# Altium PCB DE-260924.PcbDoc
Units mil, origin at the board's own origin, x right, y up, seen from the top; angles counter-clockwise.
Board outline 2677.17 x 2362.2 mil, 2 copper layers (Top Layer, Bottom Layer); 96 components, 62 nets, 249 pads, 31 vias.
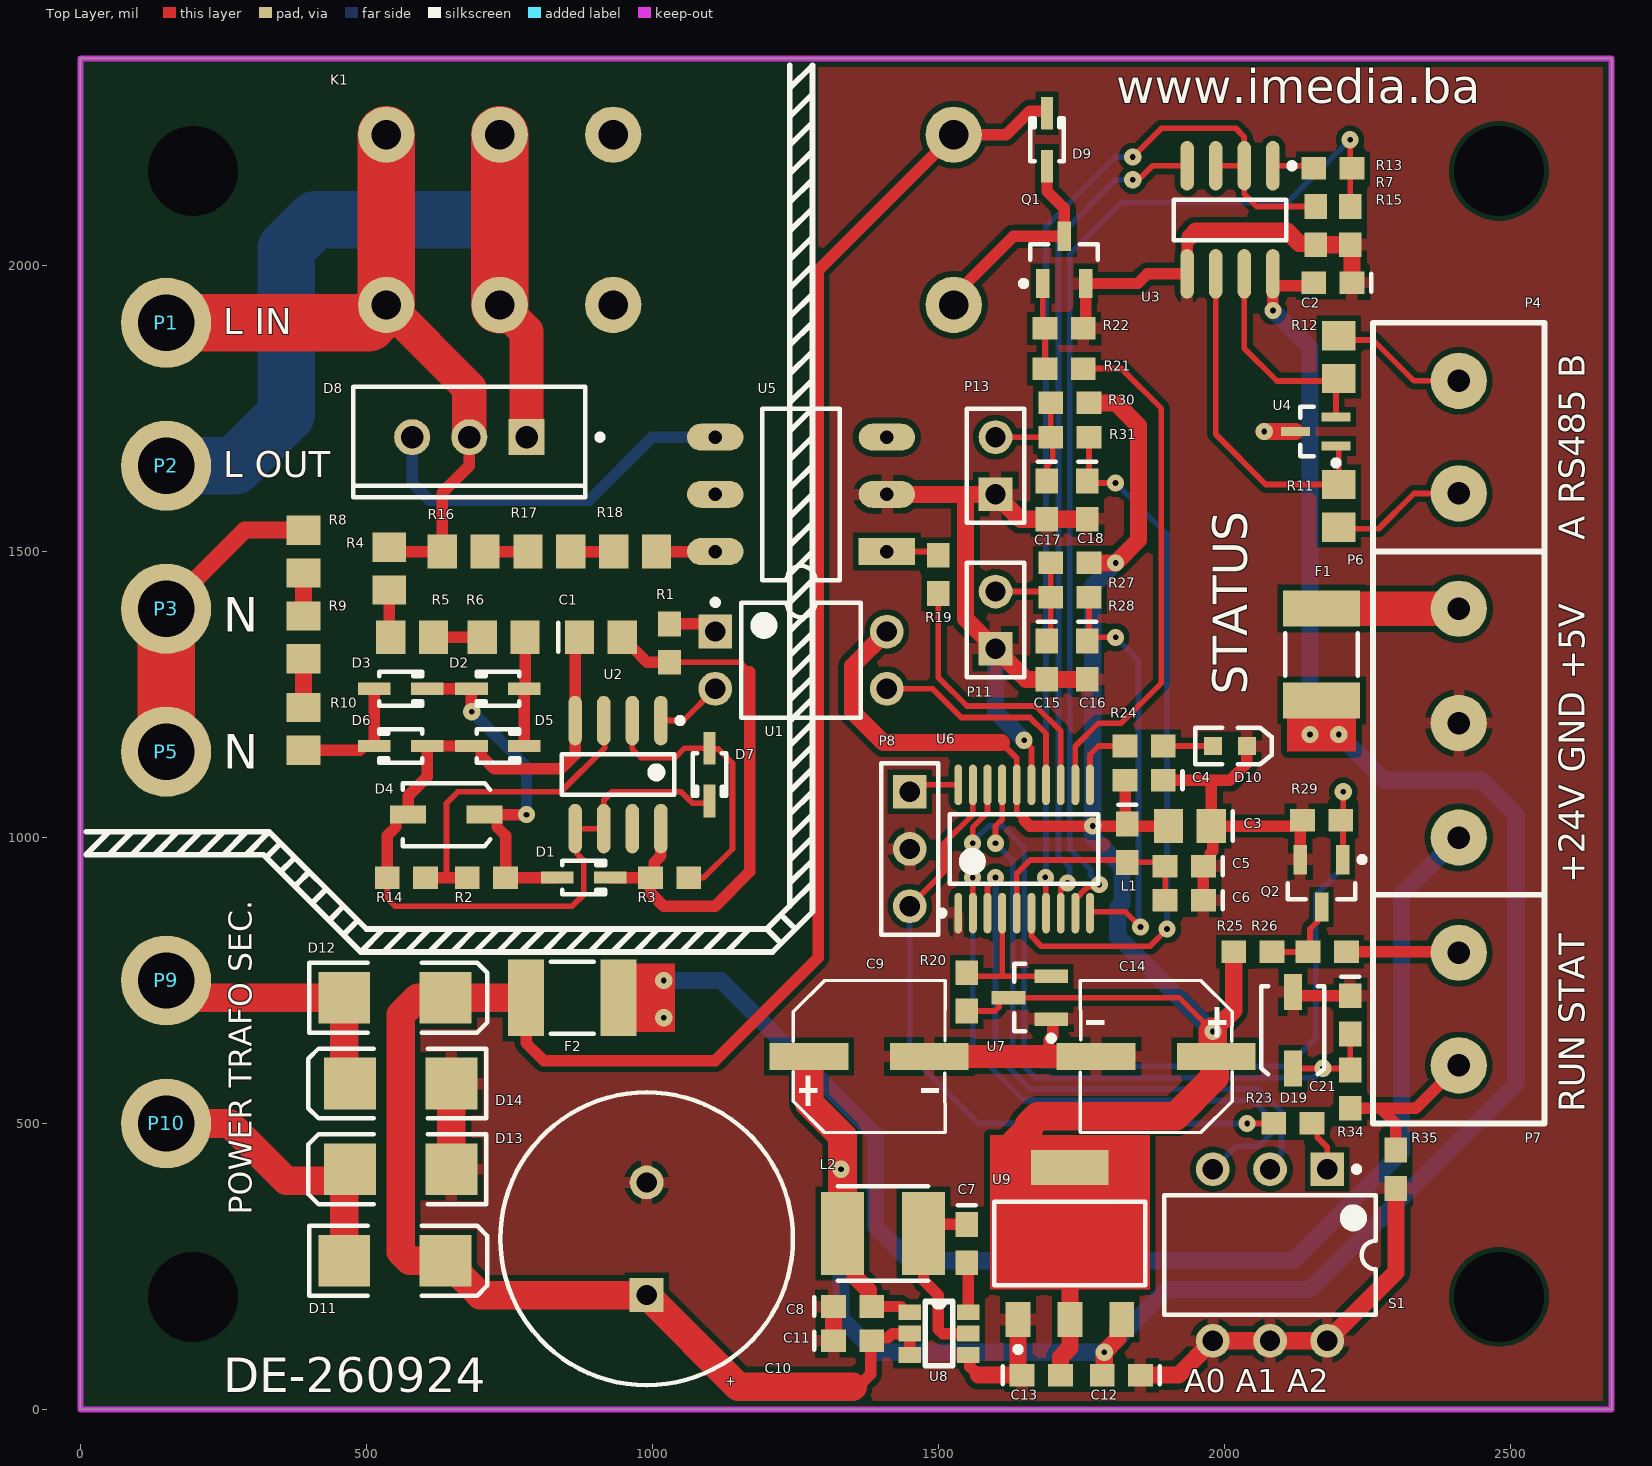
[diagram p0: Top Layer view]
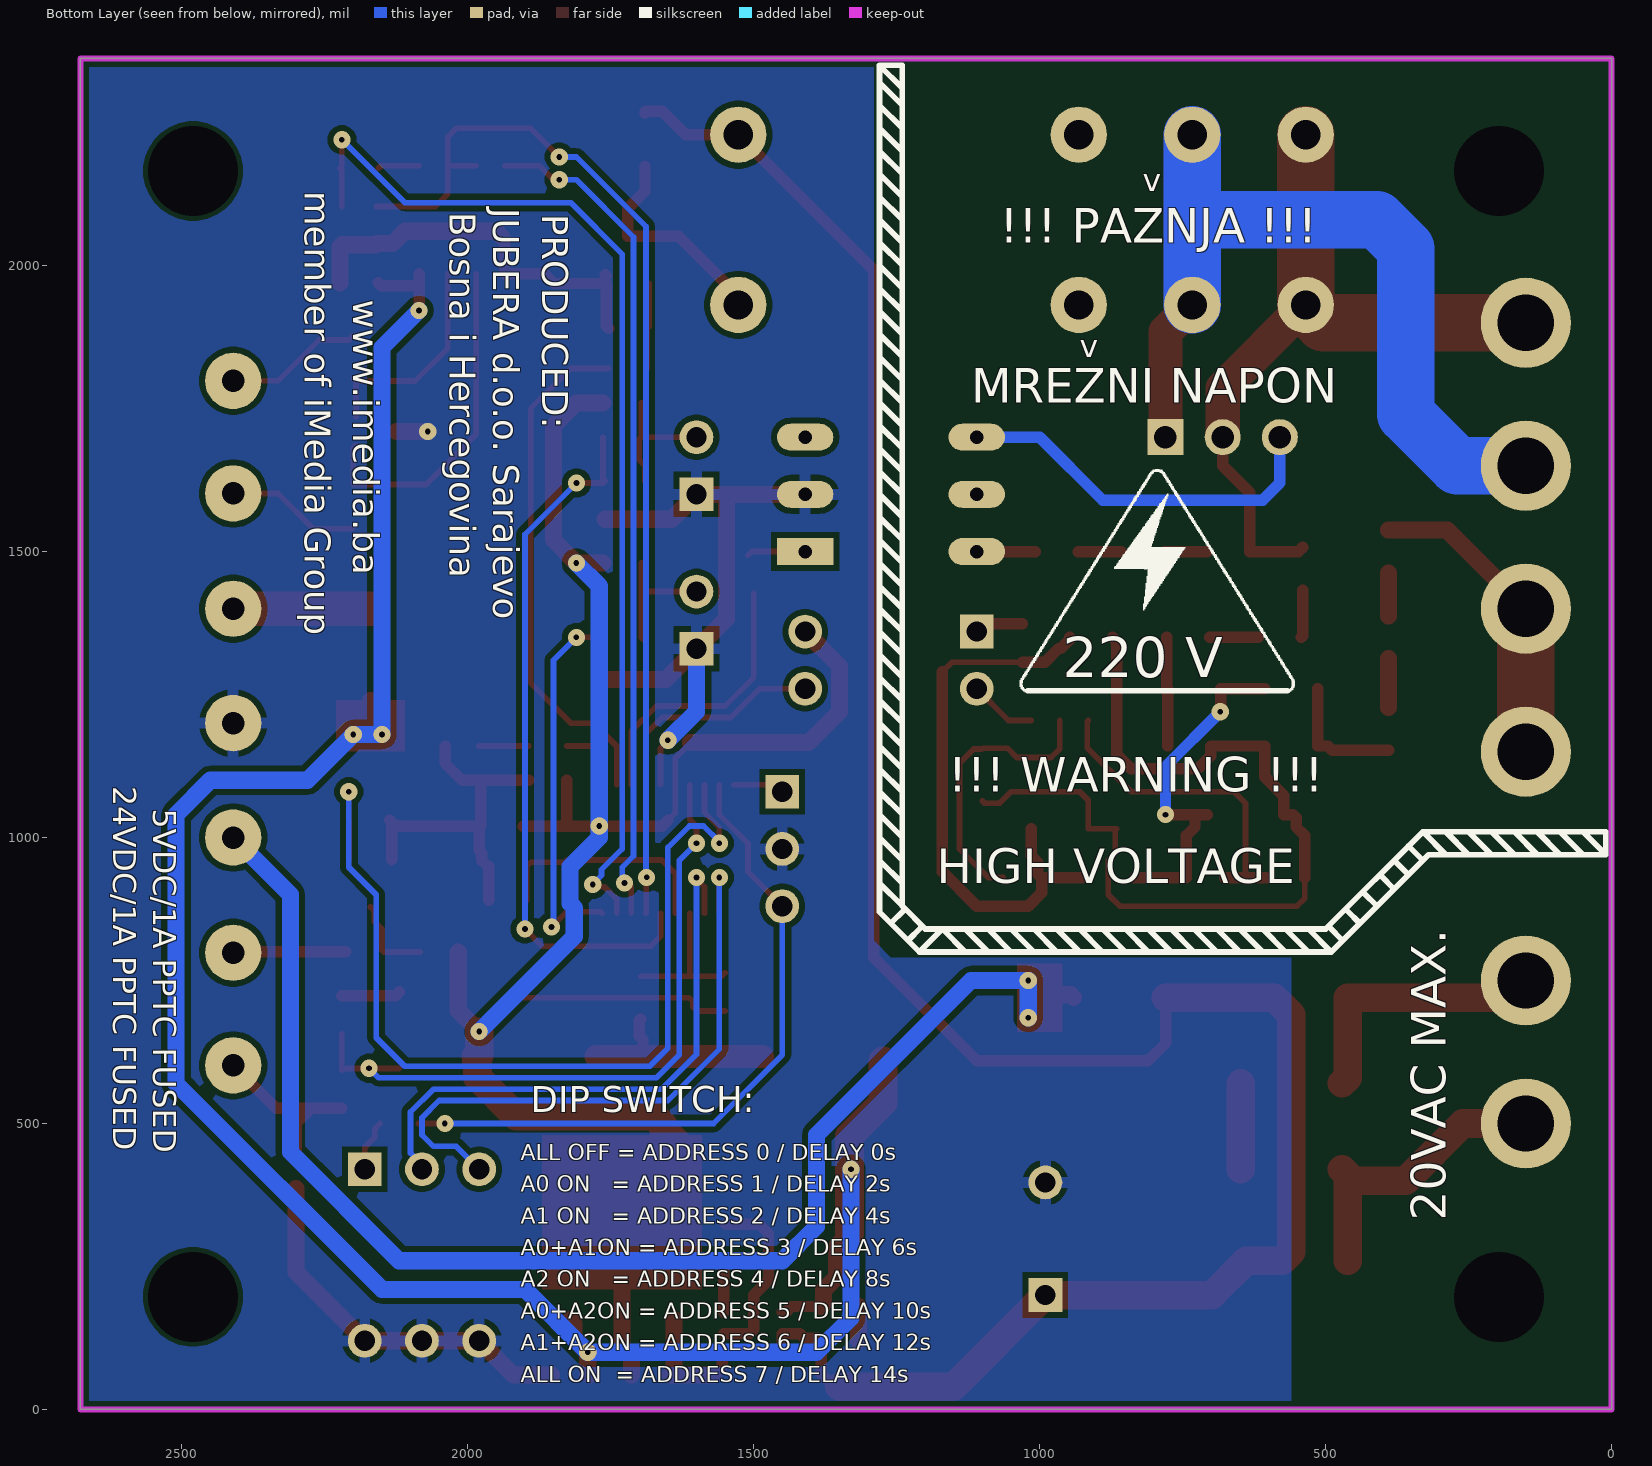
[diagram p1: Bottom Layer view, seen from below]

## Layer stack, top to bottom
Top Solder: solder mask 0.4, Solder Resist, Dk 3.5
Top Layer: signal copper 1.4
Dielectric 1: dielectric 12.6, FR-4, Dk 4.8
Bottom Layer: signal copper 1.4
Bottom Solder: solder mask 0.4, Solder Resist, Dk 3.5

## Board outline
0,0 0,2362.2 2677.17,2362.2 2677.17,0

## Design rules (kind name [scope] priority, off if disabled: settings)
BoardOutlineClearance [All] p1: gap=11.81 ignorepadtopadclearanceinfootprint=FALSE except(15.75: Arc-SplitBarrior Arc-SplitContinuation Track-SplitBarrior Track-SplitContinuation SMDPad-SplitBarrior SMDPad-SplitContinuation THPad-SplitBarrior THPad-SplitContinuation Via-SplitBarrior Via-SplitContinuation Fill-SplitBarrior Fill-SplitContinuation Poly-SplitBarrior Poly-SplitContinuation Region-SplitBarrior Region-SplitContinuation Text-SplitBarrior Text-SplitContinuation)
Clearance "Clearance Different Nets" [All] p1: gap=10 ignorepadtopadclearanceinfootprint=FALSE except(3.5: Arc-Arc Arc-Track Arc-SMDPad Track-Track Track-SMDPad; 5: SMDPad-SMDPad SMDPad-Via THPad-Via Via-Via; 7.87: Arc-THPad Arc-Hole Track-THPad Track-Hole SMDPad-THPad SMDPad-Hole THPad-Hole Fill-Hole Poly-Hole Region-Hole Text-Hole; 19.68: THPad-THPad Via-Hole)
Clearance "Clearance Same Nets" [All] p2: gap=7.87 ignorepadtopadclearanceinfootprint=FALSE except(3.5: Arc-Arc Arc-Track Arc-SMDPad Track-Track Track-SMDPad SMDPad-SMDPad; 5: SMDPad-Via THPad-Via; 10: Arc-Via Arc-Text Track-Via Track-Text SMDPad-Text THPad-Text Via-Via Via-Text Fill-Text Poly-Text Region-Text Text-Text)
Clearance "Clearance Bottom Layer" [OnLayer('Bottom Layer')] p3: gap=10 ignorepadtopadclearanceinfootprint=TRUE except(8: Arc-Arc Arc-Track Arc-SMDPad Arc-THPad Arc-Via Arc-Hole Track-Track Track-SMDPad Track-THPad Track-Via Track-Hole SMDPad-SMDPad SMDPad-THPad SMDPad-Via SMDPad-Hole THPad-THPad THPad-Via THPad-Hole Via-Via Via-Hole Fill-Hole Poly-Hole Region-Hole Text-Hole)
Clearance "Clearance Top Layer" [OnLayer('Top Layer')] p4: gap=10 ignorepadtopadclearanceinfootprint=TRUE except(8: Arc-Arc Arc-Track Arc-SMDPad Arc-THPad Arc-Via Arc-Hole Track-Track Track-SMDPad Track-THPad Track-Via Track-Hole SMDPad-SMDPad SMDPad-THPad SMDPad-Via SMDPad-Hole THPad-THPad THPad-Via THPad-Hole Via-Via Via-Hole Fill-Hole Poly-Hole Region-Hole Text-Hole)
Height [All] p1: minheight=0 maxheight=2000 prefheight=500
HoleSize [All] p1: absolutevalues=TRUE maxlimit=248.03 minlimit=7.87 maxpercent=80.000 minpercent=20.000
MinimumAnnularRing [All] p1: minimumring=5.12
MinimumSolderMaskSliver [All] p1: minsoldermaskwidth=3.94
PolygonConnect PolygonConnect_1 [All] p1: thpad.connectstyle=Relief thpad.reliefconductorwidth=20 thpad.reliefentries=4 thpad.polygonreliefangle="90 Angle" thpad.airgapwidth=10 smdpad.connectstyle=Relief smdpad.reliefconductorwidth=20 smdpad.reliefentries=4 smdpad.polygonreliefangle="90 Angle" smdpad.airgapwidth=10 via.connectstyle=Direct via.reliefconductorwidth=20 via.reliefentries=4 via.polygonreliefangle="90 Angle" via.airgapwidth=10
RoutingCorners [All] p1: cornerstyle=Round minsetback=100 maxsetback=100
RoutingVias [All] p1: holewidth=19.68 width=39.37 viastyle="Through Hole" minholewidth=7.87 minwidth=13.78 maxholewidth=39.37 maxwidth=78.74
SilkToSilkClearance [All] p1: silktosilkclearance=3.94
SilkToSolderMaskClearance [IsPad] p1: minsilkscreentomaskgap=3.94 clearancetoexposedcopper=TRUE
SolderMaskExpansion [All] p1: expansion=4 istentingtop=FALSE
SupplyNets "Schematic Supply Nets_3" [InNet('+3V3')] p1: voltage=0.000
SupplyNets "Schematic Supply Nets_2" [InNet('GND')] p2: voltage=0.000
SupplyNets "Schematic Supply Nets_1" [InNet('+5V')] p3: voltage=0.000
SupplyNets "Schematic Supply Nets" [InNet('+24V')] p4: voltage=0.000
Width [All] p1: maxlimit=100 minlimit=3.5 preferedwidth=15
24 further rules are at their usual default settings.

## Components (designator, comment, footprint, x,y, rotation, side; value= is the part's Value field where it differs from the comment)
C1 "" 0805 910,1350 r0 top value=10uF
C2 "" 0603 2190,1970 r180 top value=100nF
C3 "C0805" 0805 1940,1020 r180 top value=4u7
C4 "C0603" 0603 1860,1100 r180 top value=100nF
C5 "C0603" 0603 1930,950 r180 top value=1uF
C6 "C0603" 0603 1930,890 r180 top value=10nF
C7 "" 0603 1550,290 r270 top value=100nF
C8 "C0603" 0603 1350,180 r0 top value=100nF
C9 "470uF" "SMD,D6.3xL7.7mm Aluminum Electrolytic Capacitors" 1390,614.18 r0 top value=10uF
C10 "4700uF" CAPPR5-13X25 990,298.43 r90 top
C11 "" 0603 1350,120 r0 top value=100nF
C12 "" 0603 1820,60 r180 top value=100nF
C13 "" 0603 1680,60 r0 top value=100nF
C14 "220uF" "SMD,D6.3xL7.7mm Aluminum Electrolytic Capacitors" 1870,620 r180 top value=10uF
C15 "1uF" 0603 1690,1310 r270 top
C16 "" 0603 1760,1310 r270 top value=1uF
C17 "" 0603 1690,1590 r270 top value=1uF
C18 "" 0603 1760,1590 r270 top value=1uF
C21 "" 0603 2220,690 r270 top value=100nF
D1 "1N4148" SOD323 880,930 r0 top
D2 "1N4148" SOD323 730,1260 r180 top
D3 "1N4148" SOD323 560,1260 r0 top
D4 "BZT52C12" SOD-123 640,1040 r0 top
D5 "1N4148" SOD323 730,1160 r0 top
D6 "1N4148" SOD323 560,1160 r180 top
D7 "1N4148" SOD323 1100,1110 r270 top
D8 "BTA16-600" ONSC-TO-220-3-221A-07 680,1700 r270 top
D9 "1N4148" SOD323 1690,2220 r90 top
D10 "STATUS_LED" 1.6X0.8X0.8 2010,1160 r0 top
D11 "S3GB" SMB 550,260 r0 top
D12 "S3GB" SMB 550,720 r0 top
D13 "S3GB" SMB 560,420 r180 top
D14 "S3GB" SMB 560,570 r180 top
D19 "BZT52C3V3" SOD-123 2120,663.07 r270 top
F1 "1,1A 16V" 12-1812 2170,1320 r90 top
F2 "1,1A 30V" 12-1812 860,720 r0 top
K1 "RPS" "RPS 2CO 8A 24V" 1130,2080 r180 top
L1 "BLM15AG121" 0603 1830,990 r270 top
L2 "4,7uH" XRNR4030-4.7uH/M 1400,310 r0 top
P1 "220VAC LIVE IN" "WIRE PAD" 150,1900 r0 top
P2 "220VAC LIVE OUT" "WIRE PAD" 150,1650 r0 top
P3 "220VAC NEUTRAL OUT" "WIRE PAD" 150,1400 r0 top
P4 "RS485" "TERMINAL BLOK 2" 2410,1700 r0 top
P5 "220VAC NEUTRAL IN" "WIRE PAD" 150,1150 r0 top
P6 "POWER" "TERMINAL BLOK 3" 2410,1200 r0 top
P7 "CTRL" "TERMINAL BLOK 2" 2410,700 r0 top
P8 "ICSP" HDR1X3 1450,1080 r270 top
P9 "POWER TRAFO SEC." "WIRE PAD" 150,750 r0 top
P10 "POWER TRAFO SEC." "WIRE PAD" 150,500 r0 top
P11 "NTC10K" HDR1X2 1600,1330 r90 top
P13 "NTC10K" HDR1X2 1600,1600 r90 top
Q1 "MMBT2222A" SOT23_N 1720,2010 r90 top
Q2 "BSS123" SOT23_N 2170,920 r270 top
R1 "1K" ERA-0603 1030,1340 r270 top
R2 "3K9" ERA-0603 710,930 r0 top
R3 "39K" ERA-0603 1030,930 r180 top
R4 "0805" ERA-0805 540,1470 r270 top value=18K
R5 "18K" ERA-0805 580,1350 r0 top
R6 "18K" ERA-0805 740,1350 r0 top
R7 "10K" ERA-0603 2160,2070 r270 top
R8 "18K" ERA-0805 390,1500 r270 top
R9 "18K" ERA-0805 390,1350 r270 top
R10 "18K" ERA-0805 390,1190 r270 top
R11 "10R" ERA-0805 2200,1580 r90 top
R12 "10R" ERA-0805 2200,1840 r270 top
R13 "1K2" ERA-0603 2190,2170 r0 top
R14 "39K" ERA-0603 570,930 r0 top
R15 "2K2" ERA-0603 2220,2070 r90 top
R16 "220R" ERA-0805 670,1500 r0 top
R17 "220R" ERA-0805 820,1500 r0 top
R18 "220R" ERA-0805 970,1500 r0 top
R19 "180R" ERA-0603 1500,1460 r90 top
R20 "180R" ERA-0603 1550,730 r90 top value=10K
R21 "1K" ERA-0603 1720,1820 r180 top
R22 "100K" ERA-0603 1720,1890 r180 top
R23 "180R" ERA-0603 2120,500 r180 top value=10K
R24 "180R" ERA-0603 1860,1160 r180 top value=4K7
R25 "180R" ERA-0603 2050,800 r0 top value=10K
R26 "10R" ERA-0603 2180,800 r0 top
R27 "10K" ERA-0603 1730,1480 r0 top
R28 "1K" ERA-0603 1730,1420 r180 top
R29 "180R" ERA-0603 2170,1030 r180 top value=10K
R30 "10K" ERA-0603 1730,1760 r0 top
R31 "1K" ERA-0603 1730,1700 r180 top
R34 "180R" ERA-0603 2220,560 r270 top value=10K
R35 "180R" ERA-0603 2300,420 r270 top value=4K7
S1 "SW DIP-3" DIP-6 2080,270 r270 top
U1 "PC817" DIP-4 1260,1310 r0 top
U2 "LM393MX" M08A_N 940,1110 r270 top
U3 "SN75176BD" D008_N 2010,2080 r270 top
U4 "ESDS552" DCK3_N 2160,1710 r180 top
U5 "MOC3052" DIP6 1410,1500 r180 top
U6 "STM32F030F4P6" STM-TSSOP20_N 1650,980 r90 top
U7 "TLV803MDBZR" DBZ3_N 1660,720 r180 top
U8 "AP63205" TSOT-26 1450,170 r0 top
U9 "REG1117-3.3" ZZ311 1730,290 r0 top

## Footprints (in the part's own frame and the unit in brackets; to place one, negate y for a bottom-side part, rotate by r counter-clockwise, add the part's x,y. Pads: shape width x height; smd on the part's side, far side on the other; paste and mask are expansions set on the pad)
1.6X0.8X0.8 [mm] "SM LED; 2 Flat Leads"
  rect 0.8x0.8 smd: 1(-0.75,0) 2(0.75,0)
  silkscreen extent -1.55,-0.8 1.85,0.8
12-1812 [mm] "Chip Resistor; Body 4.5 x 3.2 mm (LxW typ)"
  rect 1.6x3.4 smd: 1(-2.05,0) 2(2.05,0)
  silkscreen extent -0.95,-1.6 0.95,1.6
0603 [mm] "Chip Capacitor; Body 1.6 x 0.8 mm (LxW typ)"
  rect 1.1x1 smd: 1(-0.85,0) 2(0.85,0)
  silkscreen extent -1.7,-0.4 -1.7,0.4
0805 [mm] "Chip Capacitor; Body 2.0 x 1.2 mm (LxW typ)"
  rect 1.3x1.5 smd: 1(-0.95,0) 2(0.95,0)
  silkscreen extent -1.9,-0.65 -1.9,0.65
CAPPR5-13X25 [mm] "Capacitor, Electrolytic, Radial; Body 13 x 25 mm (Dia.xH typ); Pin Spacing 5 mm (typ)"
  rect 1.5x1.5 hole 0.9: 1(-2.5,0)
  round 1.5 hole 0.9: 2(2.5,0)
  silkscreen extent -6.5,-6.5 6.5,6.5
D008_N [mm] "SOIC, 8-Leads, Body 4.9x3.9mm, Pitch 1.27mm, IPC Medium Density"
  oval 2.2x0.6 smd: 1(-2.4,1.905) 2(-2.4,0.635) 3(-2.4,-0.635) 4(-2.4,-1.905) 5(2.4,-1.905) 6(2.4,-0.635) 7(2.4,0.635) 8(2.4,1.905)
  silkscreen extent -2.52,-2.5 0.9,2.88, body extent -1.95,-2.45 1.95,2.45, height 1.75
DBZ3_N [mm] "SOT23, 3-Leads, Body 2.9x1.3mm, Pitch 0.95mm, Lead Span 2.4mm, IPC Medium Density"
  rect 1.5x0.6 smd: 1(-0.95,0.95) 2(-0.95,-0.95) 3(0.95,0)
  silkscreen extent -1.07,-1.5 0.7,1.92, body extent -0.7,-1.52 0.7,1.52, height 1.12
DCK3_N [mm] "SOT23, 3-Leads, Body 2.0x1.25mm, Pitch 0.65mm, Lead Span 2.1mm, IPC Medium Density"
  rect 1.3x0.4 smd: 1(-0.9,0.65) 2(-0.9,-0.65) 3(0.9,0)
  silkscreen extent -1.02,-1.1 0.7,1.52, body extent -0.7,-1.07 0.7,1.08, height 1.1
DIP6 [mm]
  rect 2.5x1.2 hole 0.6: 1(0,0)
  oval 2.5x1.2 hole 0.6: 2(0,-2.54) 3(0,-5.08) 4(7.62,-5.08) 5(7.62,-2.54) 6(7.62,0)
  silkscreen extent 2.08,-6.35 5.54,1.27, body extent 0.63,-6.48 6.99,1.27, height 1
DIP-4 [mm] "DIP; 4 Leads; Row Spacing 7.62 mm; Pitch 2.54 mm"
  rect 1.5x1.5 hole 0.9: 1(-3.81,1.27)
  round 1.5 hole 0.9: 2(-3.81,-1.27) 3(3.81,-1.27) 4(3.81,1.27)
  silkscreen extent -3.93,-2.55 2.65,2.69, body extent -3.15,-2.5 3.15,2.5, height 5.6
DIP-6 [mm] "DIP; 6 Leads; Row Spacing 7.62 mm; Pitch 2.54 mm"
  rect 1.5x1.5 hole 0.9: 1(-3.81,2.54)
  round 1.5 hole 0.9: 2(-3.81,0) 3(-3.81,-2.54) 4(3.81,-2.54) 5(3.81,0) 6(3.81,2.54)
  silkscreen extent -3.93,-4.7 2.65,4.7, body extent -3.55,-4.7 3.55,4.7, height 5.46
ERA-0603 [mm] "Chip Resistor; Body 1.6 x 0.8 mm (LxW typ)"
  rect 1.1x1 smd: 1(-0.85,0) 2(0.85,0)
ERA-0805 [mm] "Chip Resistor; Body 2 x 1.3 mm (LxW typ)"
  rect 1.3x1.5 smd: 1(-0.95,0) 2(0.95,0)
HDR1X2 [mm] "Connector; Header; 2 Position"
  rect 1.5x1.5 hole 0.9: 1(0,0)
  round 1.5 hole 0.9: 2(2.54,0)
  silkscreen extent -1.27,-1.27 3.81,1.27
HDR1X3 [mm] "Connector; Header; 3 Position"
  rect 1.5x1.5 hole 0.9: 1(0,0)
  round 1.5 hole 0.9: 2(2.54,0) 3(5.08,0)
  silkscreen extent -1.27,-1.27 6.35,1.27
M08A_N [mm] "SOIC, 8-Leads, Body 4.9x3.9mm, Pitch 1.27mm, IPC Medium Density"
  oval 2.2x0.6 smd: 1(-2.4,1.905) 2(-2.4,0.635) 3(-2.4,-0.635) 4(-2.4,-1.905) 5(2.4,-1.905) 6(2.4,-0.635) 7(2.4,0.635) 8(2.4,1.905)
  silkscreen extent -2.52,-2.5 0.9,2.88, body extent -2,-2.5 2,2.5, height 1.75
ONSC-TO-220-3-221A-07 [mm] "FM, 3-Leads, Body 10.3x4.85mm, Pitch 2.54mm"
  rect 1.6x1.6 hole 1: 1(0,2.54)
  round 1.6 hole 1: 2(0,0) 3(0,-2.54)
  silkscreen extent -2.23,-5.15 2.67,5.93, body extent -2.21,-5.15 2.64,5.15, height 19.68
"RPS 2CO 8A 24V" [mm] "PCB Relej, 2 CO, 8A, serije RPS, raster 5mm"
  round 2.5 hole 1.3: 11(10.08,3.78) 12(5.04,3.78) 14(15.12,3.78) 21(10.08,-3.78) 22(5.04,-3.78) 24(15.12,-3.78) A1(-10.08,3.78) A2(-10.08,-3.78)
  body extent -12.68,-6.35 16.32,6.35, height 16
SMB [mm] "DO-214-AA/SMB; 2 C-Bend Leads; Body 5.3 x 3.6 mm, inc. leads (LxW)"
  rect 2.3x2.3 smd: 1(-2.25,0) 2(2.25,0)
  silkscreen extent -3.8,-1.55 4.1,1.55
"SMD,D6.3xL7.7mm Aluminum Electrolytic Capacitors" [mm]
  rect 3.5x1.2 smd paste+0 mask+0.051: 1(-2.949,0.074) 2(2.391,0.074)
  silkscreen extent -3.66,-3.3 3.1,3.45, body extent -3.4,-3.15 2.9,3.15, height 7.7
SOD323 [mm] "SOD-323/SC-76; 2 Leads; Body 1.7 x 1.3 mm, (LxW)"
  rect 1.45x0.55 smd: 1(1.175,0) 2(-1.175,0)
  silkscreen extent -0.95,-0.75 0.95,0.75
SOD-123 [mm] "SOD-123; 2 Leads; Body 2.7 x 1.6 mm, (LxW)"
  rect 1.6x0.8 smd: 1(-1.7,0) 2(1.7,0)
  silkscreen extent -1.95,-1.4 1.95,1.4
SOT23_N [mm] "SOT23, 3-Leads, Body 2.9x1.3mm, Pitch 0.95mm, Lead Span 2.3mm, IPC Medium Density"
  rect 1.3x0.6 smd: 1(-1.05,0.95) 2(-1.05,-0.95) 3(1.05,0)
  silkscreen extent -1.17,-1.5 0.7,1.92, body extent -0.7,-1.5 0.7,1.5, height 1.1
STM-TSSOP20_N [mm] "SOP, 20-Leads, Body 6.6x4.5mm, Pitch 0.65mm, IPC Medium Density"
  oval 1.8x0.35 smd: 1(-2.85,2.925) 2(-2.85,2.275) 3(-2.85,1.625) 4(-2.85,0.975) 5(-2.85,0.325) 6(-2.85,-0.325) 7(-2.85,-0.975) 8(-2.85,-1.625) 9(-2.85,-2.275) 10(-2.85,-2.925) 11(2.85,-2.925) 12(2.85,-2.275) 13(2.85,-1.625) 14(2.85,-0.975) 15(2.85,-0.325) 16(2.85,0.325) 17(2.85,0.975) 18(2.85,1.625) 19(2.85,2.275) 20(2.85,2.925)
  silkscreen extent -2.97,-3.3 1.55,3.77, body extent -2.25,-3.3 2.25,3.3, height 1.2
"TERMINAL BLOK 2" [mm] "Terminal blok 3,5mm"
  round 2.5 hole 1: 1(0,-2.5) 2(0,2.5)
  silkscreen extent -3.81,-5.08 3.81,5.08
"TERMINAL BLOK 3" [mm] "Terminal blok konektor 3 pina"
  round 2.5 hole 1: 1(0,5.08) 2(0,0) 3(0,-5.08)
  silkscreen extent -3.81,-7.62 3.81,7.62
TSOT-26 [mm]
  rect 1x0.7 smd: 1(0,0) 2(0,-0.95) 3(0,-1.9) 4(2.6,-1.9) 5(2.6,-0.95) 6(2.6,0)
  silkscreen extent 0.69,-2.38 1.91,0.48, body extent 0.53,-2.51 2.03,0.61, height 1
"WIRE PAD" [mm]
  round 4 hole 2.5: 1(0,0)
XRNR4030-4.7uH/M [mm] "2A 4.7uH Magnetic Adhesive Inductor ±20% 2.9A SMD-2P,4x4mm Power Inductors ROHS"
  rect 1.9x3.7 smd paste+0 mask+0.051: 1(-1.717,-0.059) 2(1.883,-0.059)
  silkscreen extent -1.92,-2.16 2.08,2.04
ZZ311 [mm] "SOT-223/SC-73; 4 Leads; Body 6.7 x 7.3 mm, inc. leads (LxW max)"
  rect 1.1x1.55 smd: 1(-2.3,-3.375) 2(0,-3.375) 3(2.3,-3.375)
  rect 3.45x1.55 smd: 4(0,3.375)
  silkscreen extent -3.35,-4.82 3.35,1.85

## Part data
C1: library part C0805, "Ceramic Chip Capacitor - Standard", PackageDocument=Mar-2001, Code_IPC=2012[0805], Code_JEITA=0805, ComponentLink1Description="Manufacturer Link", ComponentLink1URL=http://www.kemet.com/, ComponentLink2Description=Datasheet, ComponentLink2URL=http://www.kemet.com/kemet/web/homepage/kechome.nsf/vapubfilesname/F3102TA.pdf/$file/F3102TA.pdf, DatasheetDocument=Mar-2001, LatestRevisionDate=19-Mar-2004, LatestRevisionNote="Silkscreen size reduced.", Note="Footprint corresponds to dimensions for bulk cassette packaging. This case size has tightened tolerances.", PackageReference=0805, Published=17-Jul-2002, Publisher="Altium Limited"
C2 C11 C13 C15 C16 C17 C18 C21: library part C0603, "Ceramic Chip Capacitor - Standard", PackageDocument=Mar-2001, Code_IPC="1608 [0603]", Code_JEITA=0603, ComponentLink1Description="Manufacturer Link", ComponentLink1URL=http://www.kemet.com/, ComponentLink2Description=Datasheet, ComponentLink2URL=http://www.kemet.com/kemet/web/homepage/kechome.nsf/vapubfilesname/F3102TA.pdf/$file/F3102TA.pdf, DatasheetDocument=Mar-2001, LatestRevisionDate=19-Mar-2004, LatestRevisionNote="Silkscreen size reduced.", Note="Footprint corresponds to dimensions for bulk cassette packaging. This case size has tightened tolerances.", PackageReference=0603, Published=17-Jul-2002, Publisher="Altium Limited"
C3 C4 C5 C6: "Ceramic Chip Capacitor - Standard", PackageDocument=Mar-2001, ComponentLink1Description="Manufacturer Link", ComponentLink1URL=http://www.kemet.com/, ComponentLink2Description=Datasheet, ComponentLink2URL=http://www.kemet.com/kemet/web/homepage/kechome.nsf/vapubfilesname/F3102TA.pdf/$file/F3102TA.pdf, DatasheetDocument=Mar-2001, LatestRevisionDate=19-Mar-2004, LatestRevisionNote="Silkscreen size reduced.", Note="Footprint corresponds to dimensions for bulk cassette packaging. This case size has tightened tolerances.", Published=17-Jul-2002, Publisher="Altium Limited"
  C3: Code_IPC=2012[0805], Code_JEITA=0805, PackageReference=0805
  C4 C5 C6: Code_IPC="1608 [0603]", Code_JEITA=0603, PackageReference=0603
C7 C12: library part C0603, "Ceramic Chip Capacitor - 25V", PackageDocument=Mar-2001, Code_IPC="1608 [0603]", Code_JEITA=0603, ComponentLink1Description="Manufacturer Link", ComponentLink1URL=http://www.kemet.com/, ComponentLink2Description=Datasheet, ComponentLink2URL=http://www.kemet.com/kemet/web/homepage/kechome.nsf/vapubfilesname/F3102TA.pdf/$file/F3102TA.pdf, DatasheetDocument=Mar-2001, LatestRevisionDate=19-Mar-2004, LatestRevisionNote="Silkscreen size reduced.", Note="Footprint corresponds to dimensions for bulk cassette packaging. This case size has tightened tolerances.", PackageReference=0603, Published=17-Jul-2002, Publisher="Altium Limited"
C8: "Ceramic Chip Capacitor - 25V", PackageDocument=Mar-2001, Code_IPC="1608 [0603]", Code_JEITA=0603, ComponentLink1Description="Manufacturer Link", ComponentLink1URL=http://www.kemet.com/, ComponentLink2Description=Datasheet, ComponentLink2URL=http://www.kemet.com/kemet/web/homepage/kechome.nsf/vapubfilesname/F3102TA.pdf/$file/F3102TA.pdf, DatasheetDocument=Mar-2001, LatestRevisionDate=19-Mar-2004, LatestRevisionNote="Silkscreen size reduced.", Note="Footprint corresponds to dimensions for bulk cassette packaging. This case size has tightened tolerances.", PackageReference=0603, Published=17-Jul-2002, Publisher="Altium Limited"
C9: library part "ROQANG RVT1C471M0607", "470uF 16V 185mA@120Hz ±20% SMD,D6.3xL7.7mm Aluminum Electrolytic Capacitors - SMD ROHS", ComponentLink1Description="Manufacturer Link", ComponentLink1URL=http://www.vishay.com/, ComponentLink2Description=Datasheet, ComponentLink2URL=http://www.vishay.com/docs/25014/eka.pdf, DatasheetDocument=20-Feb-2001, DrillSize="Nominal, Rounded To The Nearest 0.1mm", Note="Refer to Manufacturer's Data Sheets for other lead formations", PackageReference=CAPPR2-5X11, Published=19-Mar-2004, Publisher="Altium Limited"
C10: library part EKA00GG447C00, "Aluminum Electrolytic Capacitor, Radial Style with Long Leads: 4700uF, 10V", ComponentLink1Description="Manufacturer Link", ComponentLink1URL=http://www.vishay.com/, ComponentLink2Description=Datasheet, ComponentLink2URL=http://www.vishay.com/docs/25014/eka.pdf, DatasheetDocument=20-Feb-2001, DrillSize="Nominal, Rounded To The Nearest 0.1mm", Note="Refer to Manufacturer's Data Sheets for other lead formations", PackageReference=CAPPR5-13X25, Published=19-Mar-2004, Publisher="Altium Limited"
C14: library part "ROQANG VT1C221M0607", "220uF 16V 110mA@120Hz ±20% SMD,D6.3xL7.7mm Aluminum Electrolytic Capacitors - SMD ROHS", ComponentLink1Description="Manufacturer Link", ComponentLink1URL=http://www.vishay.com/, ComponentLink2Description=Datasheet, ComponentLink2URL=http://www.vishay.com/docs/25014/eka.pdf, DatasheetDocument=20-Feb-2001, DrillSize="Nominal, Rounded To The Nearest 0.1mm", Note="Refer to Manufacturer's Data Sheets for other lead formations", PackageReference=CAPPR2-5X11, Published=19-Mar-2004, Publisher="Altium Limited"
D1 D2 D3 D5 D6 D7 D9: library part 1PS76SB10, "Schottky Barrier Diode", ComponentLink1Description="Manufacturer Link", ComponentLink1URL=http://www.semiconductors.philips.com/, ComponentLink2Description=Datasheet, ComponentLink2URL=http://www.semiconductors.philips.com/acrobat/datasheets/1PS76SB10_2.pdf, DatasheetVersion=14-Oct-1996, LatestRevisionDate=19-Mar-2004, LatestRevisionNote="Silkscreen size reduced.", PackageDescription="SOD-323/SC-76; 2 Leads; Body 1.7 x 1.3 mm, (LxW)", PackageReference=SOD323, PackageVersion=May-1999, Published=17-Sep-2003, Publisher="Altium Limited"
D4 D19: "Surface Mount Zener Diode", ComponentLink1Description="Manufacturer Link", ComponentLink1URL=http://www.vishay.com/, DatasheetDocument="REV. L-2", LatestRevisionDate=17-Jul-2002, LatestRevisionNote="Re-released for DXP Platform.", PackageReference=SOD-123, Published=8-Jun-2000, Publisher="Altium Limited"
D8: library part BTA08-600BW3G, "Triacs, Silicon Bidirectional Thyristor, 3-Pin TO-220, Pb-Free, Tube", Manufacturer="On Semiconductor", Supplier Part Number 1=BTA08-600BW3G-ND, ComponentLink1Description="Manufacturer URL", ComponentLink1URL=http://www.onsemi.com/, ComponentLink2Description=Datasheet, ComponentLink2URL=http://www.onsemi.com/pub_link/Collateral/BTA08-600BW3-D.PDF, ComponentLink3Description="Package Specification", ComponentLink3URL=http://www.onsemi.com/pub_link/Collateral/221A-07.PDF, DatasheetVersion="Rev. 1", IGT Max (mA)=50, IT(RMS) Max (A)=8, ITSM Max (A)=90, Mounting Technology="Through Hole", PackageDescription="3-Pin Flange Mount, Vertical Straight Lead, Body 9.97 x 4.445 mm, Pitch 2.54 mm", PackageReference=TO-220-3-221A-07, PackageVersion="Rev. O, 07/2008", Packing=Tube, PartNumber=BTA08-600BW3G, RoHS=Pb-Free, Supplier 1=Digi-Key, Supplier 2=Newark, Supplier 3=Mouser, Supplier Part Number 2=13P2072, Supplier Part Number 3=863-BTA08-600BW3G
D10: library part HSMB-C190, "Blue Surface Mount Chip LED, Blue", LED_Colour=Blue, ComponentLink1Description="Manufacturer Link", ComponentLink1URL=http://www.avagotech.com/, ComponentLink2Description=Datasheet, ComponentLink2URL=http://cp.literature.agilent.com/litweb/pdf/5988-5211EN.pdf, DatasheetVersion=26-Feb-2002, LuminousIntensity="1.6mcd (Minimum).", PackageDescription="SM LED; 2 Flat Leads", PackageReference=1.6X0.8X0.8, PackageVersion=Mar-2002, PCB_Layout="Complies with manufacturer's recommendation.", Published=11-Dec-2002, Publisher="Altium Limited"
D11 D12 D13 D14: library part "D Schottky", "Schottky Diode", Code_JEDEC=DO-214-AA, LatestRevisionDate=17-Jul-2002, LatestRevisionNote="Re-released for DXP Platform.", PackageDescription="DO-214-AA/SMB; 2 C-Bend Leads; Body 5.3 x 3.6 mm, inc. leads (LxW)", PackageReference=SMB, Published=8-Jun-2000, Publisher="Altium Limited"
F1 F2: library part ERJL12, "Retriggerable SMD fuse 1,1A, 16V", PackageDocument=Mar-2003, ComponentLink1Description="Manufacturer Link", ComponentLink1URL=http://www.panasonic.com/industrial/components/resistive_products.htm, ComponentLink2Description=Datasheet, ComponentLink2URL=http://www.panasonic.com/industrial/components/pdf/AOA0000CE3.pdf, LatestRevisionDate=19-Mar-2004, LatestRevisionNote="Silkscreen size reduced.", PackageReference=12-1812, Published=17-Dec-2003, Publisher="Altium Limited"
K1: library part "PCB relay 2CO, 8A, 24VDC, RPS serie 5mm"
L1: library part "Chip inductor", "SMD chip inductor", Code_IEC=1005, Code_JEITA=0402, LatestRevisionDate=29-May-2009, LatestRevisionNote="IPC-7351 Footprint Added.", PackageDescription="Chip Inductor", PackageReference=0402-A, Published=8-Jun-2000, Publisher="Altium Limited"
L2: library part Inductor
P1 P2 P3 P5 P9 P10: library part "Wire Lug"
P4 P7: library part "TERMINAL BLOK 2", "Terminal blok konektor 3,5 mm"
P6: library part "TERMINAL BLOK 3", "3 pinski terminal blok konektor"
P8: library part "Header 3", "Header, 3-Pin", LatestRevisionDate=17-Jul-2002, LatestRevisionNote="Re-released for DXP Platform.", Publisher="Altium Limited"
P11 P13: library part "Header 2", "Header, 2-Pin", LatestRevisionDate=17-Jul-2002, LatestRevisionNote="Re-released for DXP Platform.", Publisher="Altium Limited"
Q1: library part BC817, "NPN General-purpose Transistor", ComponentLink1Description="Manufacturer Link", ComponentLink1URL=http://www.semiconductors.philips.com/, ComponentLink2Description=Datasheet, ComponentLink2URL=http://www.semiconductors.philips.com/acrobat/datasheets/BC817_BC817W_BC337_5.pdf, DatasheetVersion=Jun-1999, LatestRevisionDate=12-Dec-2006, LatestRevisionNote="IPC-7351 Footprint Added.", PackageDescription="3-Pin SOT-23 Package 0.95 mm Pitch, 2.3 mm Lead Span", PackageReference=SOT23, PackageVersion=May-1999, Published=17-Sep-2003, Publisher="Altium Limited"
Q2: "N-channel Enhancement Mode Vertical D-MOSFET", ComponentLink1Description="Manufacturer Link", ComponentLink1URL=http://www.semiconductors.philips.com/, ComponentLink2Description=Datasheet, ComponentLink2URL=http://www.semiconductors.philips.com/acrobat/datasheets/BSS123_3.pdf, DatasheetVersion=Apr-1995, LatestRevisionDate=12-Dec-2006, LatestRevisionNote="IPC-7351 Footprint Added.", PackageDescription="3-Pin SOT-23 Package 0.95 mm Pitch, 2.3 mm Lead Span", PackageReference=SOT23, PackageVersion=May-1999, Published=17-Sep-2003, Publisher="Altium Limited"
R1 R2 R3 R7 R13 R14 R15 R19 R20 R21 R22 R23 R24 R25 R27 R28 R29 R30 R31 R34 R35: library part ERAV, "Metal Film Thermosensitive Chip Resistor, 0.56 Ohm to 10k Ohm Range, 5% Tolerance, 0603 Size, 0.063 W", PackageDocument=Mar-2003, Code_IPC="1608 [0603]", ComponentLink1Description="Manufacturer Link", ComponentLink1URL=http://www.panasonic.com/industrial/components/resistive_products.htm, ComponentLink2Description=Datasheet, ComponentLink2URL=http://www.panasonic.com/industrial/components/pdf/AOF0000CE1.pdf, LatestRevisionDate=19-Mar-2004, LatestRevisionNote="Silkscreen size reduced.", Note="If flow soldering, adjust pad width of PCB Footprint to 0.7 - 0.8 times the width of the resistor.", PackageReference=ERA-0603, Published=17-Dec-2003, Publisher="Altium Limited"
R4 R5 R6 R8 R9 R10 R11 R12 R16 R17 R18: library part ERAS, "Metal Film Thermosensitive Chip Resistor, 0.56 Ohm to 10k Ohm Range, 5% Tolerance, 0805 Size, 0.1 W", PackageDocument=Mar-2003, Code_IPC="2012 [0805]", ComponentLink1Description="Manufacturer Link", ComponentLink1URL=http://www.panasonic.com/industrial/components/resistive_products.htm, ComponentLink2Description=Datasheet, ComponentLink2URL=http://www.panasonic.com/industrial/components/pdf/AOF0000CE1.pdf, LatestRevisionDate=19-Mar-2004, LatestRevisionNote="Silkscreen size reduced.", Note="If flow soldering, adjust pad width of PCB Footprint to 0.7 - 0.8 times the width of the resistor.", PackageReference=ERA-0805, Published=17-Dec-2003, Publisher="Altium Limited"
R26: library part ERA6Y, "Rectangular Thick Film Chip Resistor, 10 Ohm to 1M Ohm Range, 0.1% and 0.5% Tolerance, 0805 Size, 0.1 W", PackageDocument=Mar-2003, Code_IPC="2012 [0805]", ComponentLink1Description="Manufacturer Link", ComponentLink1URL=http://www.panasonic.com/industrial/components/resistive_products.htm, ComponentLink2Description=Datasheet, ComponentLink2URL=http://www.panasonic.com/industrial/components/pdf/AOA0000CE8.pdf, LatestRevisionDate=19-Mar-2004, LatestRevisionNote="Silkscreen size reduced.", Note="If flow soldering, adjust pad width of PCB Footprint to 0.7 - 0.8 times the width of the resistor.", PackageReference=ERA-0805, Published=17-Dec-2003, Publisher="Altium Limited"
S1: "DIP Switch, 3 Position, SPST", Code_JEDEC=MO-001-AM, LatestRevisionDate=17-Jul-2002, LatestRevisionNote="Re-released for DXP Platform.", PackageReference=DIP-6, Published=24-Mar-1999, Publisher="Altium Limited"
U1: "4-Pin Phototransistor Optocoupler", DatasheetVersion=Nov-2003, LatestRevisionDate=04-Mar-2005, LatestRevisionNote="Sch pins 3 & 4 Swapped.", PackageReference=DIP-4, Published=24-Mar-1999, Publisher="Altium Limited"
U2: "Low Power Low Offset Voltage Dual Comparator, 8-pin Narrow SOIC", Manufacturer="National Semiconductor", PackageTopMarking=NSZXTT*LM*393M, PowerWise=N, Code_IPC=SOIC127P600-8, Code_JEDEC=MS-012-AA, ComponentLink1Description="Manufacturer URL", ComponentLink1URL=http://www.national.com/, ComponentLink2Description="LM393 Datasheet", ComponentLink2URL=http://www.national.com/ds/LM/LM393.pdf, ComponentLink3Description="LM393 Web Page", ComponentLink3URL=http://www.national.com/pf/LM/LM393.html, ComponentLink4Description="M08A Package Page", ComponentLink4URL=http://www.national.com/packaging/folders/m08a.html, CompType=Comparator, DatasheetVersion=Aug-2002, High-Reliability=Y, PackageDescription="SOIC Narrow, 4.9 x 3.9 x 1.45mm, 8 Lead, 1.27mm Pitch", PackageReference=M08A, PackageVersion="revM, May-2009", PartNumber=LM393MX, PinCount=8, RoHS=N
U3: "Differential Bus Transceiver", Code_IPC=SOIC127P600-8, ComponentLink1Description="Manufacturer Link", ComponentLink1URL=http://www.ti.com/, ComponentLink2Description=Datasheet, ComponentLink2URL=http://www-s.ti.com/sc/ds/sn75176b.pdf, DatasheetVersion=Sep-1989, LatestRevisionDate=13-Apr-2006, LatestRevisionNote="IPC-7351 Footprint Added.", Note="Receiver Hysteresis of 50mV Typical", PackageDescription="8-Pin Small Outline Integrated Circuit 1.27 mm Pitch", PackageReference=D008, PackageVersion=Jan-1998, Published=15-May-2002, Publisher="Altium Limited"
U4: library part TPD2E007DCKR, "ESD Protection Array for AC Signal Data Interface, 2 Channels, -40 to +85 degC, 3-pin SC70 (DCK), Green (RoHS & no Sb/Br)", Breakdown Voltage(Min)(V)=+/-14, IO Capacitance(Typ)(pF)=15, IO Leakage Current(nA)=50, Manufacturer="Texas Instruments", Supplier Part Number 1=296-25281-2-ND, ComponentLink1Description=Datasheet, ComponentLink1URL=http://www.ti.com/general/docs/lit/getliterature.tsp?genericPartNumber=TPD2E007&fileType=pdf, ComponentLink2Description="URL Link1", ComponentLink2URL=SamplesURL:http://www.ti.com/product/tpd2e007#samples, DatasheetVersion=SLVS796E, Eco-Plan="Green (RoHS & no Sb/Br)", IEC 61000-4-2 Air-Gap(+/- kV)=15, IEC 61000-4-2 Contact(+/- kV)=8, Mounting Technology="Surface Mount", PackageDescription="3-Pin Plastic Small-Outline Package, 0.65 mm Pitch, 2.1 mm Lead Span", PackageReference=DCK3, PackageVersion="revG, Jan-2007", PartNumber=TPD2E007DCKR, SubFamily="ESD Solution", Supplier 1=Digi-Key, Supplier 2=Digi-Key, Supplier 3=Digi-Key, Supplier 4=Farnell, Supplier 5=Newark, Supplier 6=Newark, Supplier 7=Mouser, Supplier Part Number 2=296-25281-1-ND, Supplier Part Number 3=296-25281-6-ND, Supplier Part Number 4=2120465, Supplier Part Number 5=94T5089, Supplier Part Number 6=55R7554, Supplier Part Number 7=595-TPD2E007DCKR
U5: library part MOC3081, "Zero-Cross Optoisolator Triac Driver"
U6: "ARM Cortex-M0 32-bit MCU, 16 KB Flash, 4 KB Internal RAM, 15 I/Os, 20-pin TSSOP, -40 to 85 degC, Tube", I/Os (High Current)=15, Operating Frequency(F) (Processor speed) (MHz)=48, Supplier Part Number 1=497-14044-5-ND, Supply Voltage(Vcc) min (V)=2.4, ComponentLink1Description="Manufacturer URL", ComponentLink1URL=http://www.st.com/web/en/home.html, ComponentLink2Description=Datasheet, ComponentLink2URL=http://www.st.com/st-web-ui/static/active/en/resource/technical/document/datasheet/DM00088500.pdf, ComponentLink3Description="Package Specification", ComponentLink3URL=http://www.st.com/st-web-ui/static/active/en/resource/technical/document/datasheet/DM00065136.pdf, Core="ARM Cortex-M0", DatasheetVersion="Rev. 1", FLASH Size (Prog) (kB)=16, Internal RAM Size (kB)=4, Mounting Technology="Surface Mount", PackageDescription="20-Pin Thin Shrink Small Outline Package, 6.5 x 4.4 mm Body, 0.65 mm Pitch", PackageReference=TSSOP20, PackageVersion="Rev. 1, 11/2012", Packing=Tube, PartNumber=STM32F030F4P6, Supplier 1=Digi-Key, Supplier 2=Newark, Supplier 3=Mouser, Supplier Part Number 2=06X3648, Supplier Part Number 3=511-STM32F030F4P6
U7: "Voltage Supervisor with Active-Low, Open Drain Reset, 1 Supply Monitored, -40 to 125 degC, 3-pin SOT-23 (DBZ), Green (RoHS & no Sb/Br)", Manufacturer="Texas Instruments", Rating=Catalog, Supplier Part Number 1=296-29194-2-ND, Threshold Voltage 1 (typ)(Typ)(V)=4.38, # of supplies monitored=1, Code_JEDEC=TO-236-AB, ComponentLink1Description=Datasheet, ComponentLink1URL=http://www.ti.com/general/docs/lit/getliterature.tsp?genericPartNumber=TLV803M&fileType=pdf, DatasheetVersion=SBVS157B, Iq(Typ)(uA)=9, Mounting Technology="Surface Mount", Output Driver Type / Reset Output="Active-low, Open-drain", PackageDescription="3-Pin Plastic Small-Outline Package, 0.95 mm Pitch, 2.4 mm Lead Span", PackageReference=DBZ3, PackageVersion="revB, Apr-2005", PartNumber=TLV803MDBZR, Reset Threshold Accuracy(%)=2, SubFamily="Supervisor and Reset IC", Supplier 1=Digi-Key, Supplier 2=Digi-Key, Supplier 3=Digi-Key, Supplier 4=Newark, Supplier 5=Mouser, Supplier Part Number 2=296-29194-1-ND, Supplier Part Number 3=296-29194-6-ND, Supplier Part Number 4=58T0286, Supplier Part Number 5=595-TLV803MDBZR, Time Delay(ms)=200, VCC(Max)(V)=6, VCC(Min)(V)=1.1
U8: library part AP63200, "2A synchronous  buck converter"
U9: "800mA and 1A Low Dropout Positive Regulator 2.85V, 3.3V, 5V, and Adjustable", ComponentLink1Description="Manufacturer Link", ComponentLink1URL=http://www.ti.com/, ComponentLink2Description=Datasheet, ComponentLink2URL=http://www-s.ti.com/sc/ds/REG1117.pdf, DatasheetVersion=Sep-1997, LatestRevisionDate=17-Jul-2002, LatestRevisionNote="Re-released for DXP Platform.", PackageDescription="SOT-223/SC-73; 4 Leads; Body 6.7 x 7.3 mm, inc. leads (LxW max)", PackageReference=ZZ311, PackageVersion=revC, Published=8-Jun-2000, Publisher="Altium Limited"

## Free pads (board coordinates)
  round 60 hole 157.48: 5(196.85,196.85) 5(196.85,2165.35) 5(2480.32,196.85) 5(2480.32,2165.35)

## Via types
v1: diameter 30, hole 10, Top Layer to Bottom Layer, 31 vias

## Nets (pads, with @x,y where several pads share a name; then routed paths per layer and width w, separated by ;. In a path a pad name is that pad's centre, name@x,y a point inside that pad or via, vN(x,y) a via of type N, cw(c..) or ccw(c..) an arc to the next point about the centre after c; other vN are vias at no path point)
+3V3: C3.2 C4.2 C13.2 C14.1 L1.1 R20.1 R25.1 R27.2 R30.2 U1.4 U6.16 U7.3 U9.2 U9.4 | length 3835
  Top Layer w10: R20.1 1599.13,696.54 1606.24,703.64 1606.24,713.19 1613.05,720 U7.3 1920.72,720 v1(1980,660.72) ; 1610,1165.83 1637.2,1138.62 U6.16 1637.2,1042.8 1650,1030
  Top Layer w20: 1650,1030 1660,1020 v1(1770,1020) 1826.54,1020 L1.1 ; C4.2 1826.54,1026.93 L1.1 ; C3.2 1833.46,1020 L1.1
  Top Layer w30: U1.4 1350,1300 1350,1220 1404.17,1165.83 1610,1165.83 ; C13.2 1713.46,91.65 1720,98.19 1720.19,98.19 1730,108 U9.2 1730,240 ; R27.2 v1(1810,1480) 1850,1520 1850,1720 1810,1760 R30.2 ; v1(1980,660.72) 2016.54,697.26 R25.1
  Top Layer w50: 1730,240 1633.59,336.41 1633.59,465.19 1658.4,490 1658.4,497.2 1674.07,512.87 1915.08,512.87 1982.85,580.65 1982.85,602.81 1984.72,604.68 C14.1@1984.72,615.72 ; v1(1980,660.72) 1980,618.48 1984.72,618.48 C14.1
  Bottom Layer w30: v1(1810,1480) 1770,1440 v1(1770,1020) 1770,1000 1821.24,948.76 1821.24,884.56 1813.65,876.97 1813.65,827.08 v1(1980,660.72)
+5V: C2.2 C8.2 C9.1 C12.2 F1.1 L2.1 U3.8 U8.1 U9.3 | length 4178.9
  Top Layer w20: C8.2 1434.09,180 1444.09,170 U8.1 ; v1(2084.99,1921.62) U3.8@2085,1964.9 ; U3.8 U3.8@2085,1964.9 ; C2.2 2151.43,1964.9 U3.8@2085,1964.9
  Top Layer w30: L2.1 1354.8,285.28 1354.8,231.54 1377.97,208.37 1377.97,184.69 1382.65,180 C8.2 ; C12.2 1790,63.46 v1(1790,100) 1813.9,123.9 1813.9,150.47 U9.3 ; v1(2150,1180) 2160,1190 2160,1196.57 2162.54,1199.11 2162.54,1215.33 2170,1222.8 F1.1
  Top Layer w50: C9.1@1273.9,610 1273.9,536.1 1332.4,477.6 L2.1
  Bottom Layer w30: v1(1330,420) 1330,160 1390,100 v1(1790,100) 1900,210 2150,210 2510,570 2510,1040 2450,1100 2280,1100 v1(2200,1180) v1(2150,1180) 2150,1856.61 v1(2084.99,1921.62)
+24V: C10.1 C11.2 D9.1 D11.2 D12.2 F2.1 K1.A2 U8.2 U8.3 | length 4129.4
  Top Layer w20: F2.1 779.29,640.71 810,610 1110,610 1290,790 1290,1991.97 K1.A2 1618.82,2228.82 1660,2270 1689.17,2270 1690,2269.17 D9.1 ; 1360,40 1381.5,61.5 C11.2@1381.5,120 ; C11.2 1388.38,124.92 1411.74,124.92 1419.41,132.6 U8.2 U8.3
  Top Layer w50: F2.1 710,720 D12.2 590,720 560,690 560,275.67 575.67,260 D11.2 698.58,200 C10.1 1150,40 1350,40
AC_L: D8.2 K1.14 K1.24 P1.1 R4.1 R16.1 | length 1301.9
  Top Layer w20: R4.1 547.4,1500 R16.1 632.6,1602.6 680,1650 D8.2
  Top Layer w60: K1.14 680,1785.91 D8.2
  Top Layer w100: P1.1 503.54,1900 K1.14 K1.24
AC_N: P3.1 P5.1 R8.1 | length 546.9
  Top Layer w30: P3.1 287.4,1537.4 R8.1
  Top Layer w100: P5.1 P3.1
AC_O: D8.1 K1.11 K1.21 P2.1 | length 1777
  Top Layer w60: K1.11 780,1884.33 D8.1
  Top Layer w100: K1.11 K1.21
  Bottom Layer w100: P2.1 270,1650 360,1740 360,2030 410,2080 733.15,2080 ; K1.11 733.15,2080 ; K1.21 733.15,2080
ADDRESS_0: S1.3 U6.2 | length 1086.9
  Top Layer w10: v1(1560,930) 1560.43,929.57 U6.2
  Bottom Layer w10: v1(1560,930) 1560,630 1650,540 2050,540 2080,510 2080,480 2060,460 2020,460 S1.3
ADDRESS_1: S1.2 U6.3 | length 1027.2
  Top Layer w10: U6.3 1586.02,913.6 1600,927.57 v1(1600,930)
  Bottom Layer w10: v1(1600,930) 1600,620.91 1660.91,560 2060,560 2100,520 2100,448.19 2080,428.19 S1.2
CTRL_IN: C21.2 D19.2 R34.1 U6.17 | length 1219.7
  Top Layer w10: v1(1600,990) 1600,1020 1611.61,1031.61 U6.17 ; D19.2 2217.32,596.14 R34.1 C21.2
  Bottom Layer w10: v1(1600,990) 1630,960 1630,620 1670,580 2156.15,580 v1(2172.65,596.5)
CTRL_IN_: P7.1 R34.2 R35.1 | length 305.1
  Top Layer w20: R34.2 2273.46,526.54 ; R35.1 2300,500 2273.46,526.54 ; P7.1 2334.96,526.54 2273.46,526.54
GND: C2.1 C3.1 C4.1 C5.1 C6.1 C8.1 C9.2 C10.2 C11.1 C12.1 C13.1 C14.2 C15.2 C16.2 C17.2 C18.2 C21.1 D10.2 D13.1 D14.1 D19.1 P6.2 P8.2 P11.1 P13.1 Q1.2 Q2.2 R7.2 R15.1 R22.1 R29.2 R35.2 S1.4 S1.5 S1.6 U3.5 U4.3 U5.2 U6.1 U6.15 U7.1 U8.4 U9.1 | length 4038.9
  Top Layer w10: v1(1650,1170) 1650,1168.84 1662.8,1156.05 U6.15
  Top Layer w20: U8.4 1555.2,92.36 1555.2,74.8 1570,60 ; 1693.47,617.1 1693.47,646.31 1700,652.85 1700,680.79 1698.19,682.6 U7.1 ; R22.1 1757.4,1893.94 Q1.2 1848.66,1968.66 1865.51,1985.51 U3.5 1935,2045 1940,2050 ; Q1.2@1757.4,1982.44 Q1.2@1759.21,1984.25 ; C4.1 1970,1100 ; C6.1 C5.1 1965.43,950 1975.12,959.69 1975.12,972.09 1980,976.97 1980,1017.4 C3.1 ; D10.2 2039.53,1129.53 2010,1100 1977.4,1100 1970,1100 ; D19.1 2120,729.21 2125.75,723.46 C21.1 ; Q2.2 R29.2@2132.6,1026.06 ; R29.2 R29.2@2132.6,1026.06 ; 1970,1100 1977.4,1092.6 C3.1 ; C3.1 2118,1020 2118.31,1020.31 2126.85,1020.31 R29.2@2132.6,1026.06
  Top Layer w30: C11.1 C8.1 ; U5.2 1547.6,1600 ; 1570,60 C13.1 ; C13.1@1639.45,74.5 U9.1 ; C16.2 C15.2 1653.46,1276.54 P11.1 1547.6,1382.4 1547.6,1600 ; C18.2 C17.2 1643.46,1556.54 P13.1 1547.6,1600 ; C12.1 1920,60 S1.4 S1.5 S1.6 2300,240 R35.2 ; 1940,2050 1950,2060 2110,2060 2131.63,2038.37 2158.16,2038.37 R7.2 R15.1 2223.46,2033.07 C2.1 ; v1(2070,1710) U4.3
  Top Layer w40: C9.2@1484.16,617.1 1693.47,617.1 C14.2
  Top Layer w50: D13.1 D14.1
  Bottom Layer w30: P11.1 1600,1220 v1(1650,1170)
NetC1_1: C1.1 D4.1 D5.2 D6.2 D7.1 R14.1 U2.4 U2.5 U2.6 | length 1587.7
  Top Layer w10: R14.1 536.54,893.46 550,880 860,880 880,900 880,960 867.61,972.39 867.61,1012.91 U2.5 U2.6 915,1065 930,1080 1050,1080 1070,1060 1096.26,1060 D7.1
  Top Layer w20: R14.1 536.54,1003.46 551.65,1018.58 551.65,1034.25 557.4,1040 D4.1 573.07,1073.07 606.26,1106.26 D6.2 D5.2 700.36,1160 701.18,1159.17 701.18,1142.56 723.74,1120 840,1120 865,1145 U2.4 865,1342.4 C1.1
NetC1_2: C1.2 D1.1 R1.2 R3.2 U2.8 | length 997.8
  Top Layer w10: R1.2 1153.46,1306.54 1170,1290
  Top Layer w20: D1.1 R3.2 ; C1.2 947.4,1346.06 962.99,1330.47 966.93,1330.47 990.87,1306.54 R1.2 ; U2.8 1015,968.19 1003.12,956.3 1003.12,936.58 R3.2 ; 1170,1290 1170,940 1110,880 1020,880 996.54,903.46 R3.2
NetC5_2: C5.2 C6.2 L1.2 U6.5 | length 402.9
  Top Layer w10: U6.5 1637.2,937.2 1660.73,960.73 1825.81,960.73 L1.2 1890,956.54 C5.2 C6.2
NetC7_1: C7.1 L2.2 U8.5 | length 316.2
  Top Layer w20: C7.1 1489.92,323.46 L2.2 1474.13,225.87 1500,200 1500,140 1507.4,132.6 U8.5
NetC7_2: C7.2 U8.6 | length 87.5
  Top Layer w20: C7.2 1552.36,254.17 U8.6
NetC15_1: C15.1 P11.2 R27.1 R28.2 | length 239.9
  Top Layer w10: P11.2 1686.54,1430 R28.2 ; C15.1 1696.54,1350 R28.2 ; R27.1 R28.2
NetC17_1: C17.1 P13.2 R30.1 R31.2 | length 238.6
  Top Layer w10: P13.2 R31.2 ; C17.1 1690,1650 1700,1660 1700,1696.54 R31.2 ; R30.1 R31.2
NetD1_2: D1.2 D2.1 D3.1 D4.2 R2.2 | length 619.3
  Top Layer w20: D3.1 D2.1 683.74,1220.3 v1(684.27,1219.78) ; D4.2 D4.2@722.6,1040 ; v1(780,1040) D4.2@722.6,1040 ; D1.2 R2.2 743.46,1003.46 728.35,1018.58 728.35,1034.25 D4.2@722.6,1040
  Bottom Layer w20: v1(684.27,1219.78) 780,1124.04 v1(780,1040)
NetD2_2: D2.2 D5.1 R6.2 | length 190.7
  Top Layer w20: D5.1 D2.2 776.57,1260 777.4,1260.83 R6.2
NetD3_2: D3.2 D6.1 R10.2 | length 227.1
  Top Layer w20: R10.2 488.62,1152.6 496.02,1160 D6.1@512.91,1160 ; D6.1 D6.1@512.91,1160 ; D3.2 513.74,1160.83 D6.1@512.91,1160
NetD7_2: D7.2 R3.1 U2.2 | length 495.6
  Top Layer w10: U2.2 965,1155 980,1140 1040,1140 1056.26,1156.26 D7.2 1101.63,1154.63 1115.37,1154.63 1140,1130 1140,980 1090,930 R3.1
NetD8_3: D8.3 U5.4 | length 668
  Bottom Layer w20: D8.3 580,1620 610,1590 890,1590 1000,1700 U5.4
NetD9_2: D9.2 K1.A1 Q1.3 | length 386.9
  Top Layer w20: K1.A1 1526.85,1946.85 1631.34,2051.34 Q1.3 1720,2100 1690,2130 D9.2
NetD10_1: D10.1 R24.1 | length 87
  Top Layer w10: R24.1 D10.1
NetD11_1: D11.1 D13.2 P10.1 | length 521.1
  Top Layer w50: P10.1 260,500 360,400 451.42,400 D13.2@461.42,410 ; D11.1 D13.2@461.42,410 ; D13.2 D13.2@461.42,410
NetD12_1: D12.1 D14.2 P9.1 | length 478
  Top Layer w50: P9.1 179.08,750 209.08,720 D12.1 461.42,580 D14.2
NetF1_2: F1.2 P6.1 | length 239.3
  Top Layer w60: F1.2@2170.71,1400 P6.1
NetF2_2: F2.2 P6.3 | length 2478.5
  Top Layer w30: F2.2 945.71,725 995,725 v1(1020,750) v1(1020,685)
  Bottom Layer w30: v1(1020,685) v1(1020,750) 1120,750 1390,480 1390,320 1450,260 2120,260 2310,450 2310,900 P6.3
NetQ1_1: Q1.1 R21.2 R22.2 | length 150.3
  Top Layer w10: Q1.1 1682.6,1893.94 R22.2 R21.2
NetQ2_3: Q2.3 R25.2 R26.1 | length 151.5
  Top Layer w10: R25.2 R26.1 2150,803.46 2150,840 2163.19,853.19 2163.19,871.85 Q2.3
NetR1_1: R1.1 U1.1 | length 85.6
  Top Layer w20: R1.1 1096.54,1373.46 U1.1
NetR2_1: R2.1 R14.2 U2.3 | length 568.3
  Top Layer w10: 640,930 640,1060 660,1080 840,1080 916.64,1156.64 916.64,1202.85 U2.3
  Top Layer w20: R14.2 640,930 R2.1
NetR4_2: R4.2 R5.1 | length 83.7
  Top Layer w20: R4.2 540,1352.6 R5.1
NetR5_2: R5.2 R6.1 | length 85.2
  Top Layer w20: R5.2 R6.1
NetR8_2: R8.2 R9.1 | length 75.2
  Top Layer w30: R9.1 R8.2
NetR9_2: R9.2 R10.1 | length 85.2
  Top Layer w30: R10.1 R9.2
NetR11_2: R11.2 U3.6 U4.1 | length 601.7
  Top Layer w10: U3.6 1985,1705 2072.6,1617.4 R11.2 2200,1681.54 2197.13,1684.41 U4.1
NetR12_2: R12.2 U3.7 U4.2 | length 383.4
  Top Layer w10: U3.7 2035,1855 2091.97,1798.03 R12.2@2195.43,1798.03 ; U4.2 R12.2@2195.43,1798.03 ; R12.2 R12.2@2195.43,1798.03
NetR13_1: R13.1 U3.1 | length 73.4
  Top Layer w10: U3.1 2152.05,2174.49 R13.1
NetR16_2: R16.2 R17.1 | length 75.2
  Top Layer w20: R16.2 R17.1
NetR17_2: R17.2 R18.1 | length 75.2
  Top Layer w20: R17.2 R18.1
NetR18_2: R18.2 U5.6 | length 102.6
  Top Layer w20: R18.2 U5.6
NetR19_2: R19.2 U5.1 | length 102.7
  Top Layer w10: U5.1 1503.46,1500 R19.2@1510,1493.46
NetR20_2: R20.2 U6.4 U7.2 | length 261
  Top Layer w10: R20.2 1556.06,757.4 1610,757.4 ; U6.4 1611.61,759.02 1610,757.4 ; U7.2 1610,757.4
NetR23_1: R23.1 S1.1 | length 91
  Top Layer w10: R23.1 2162.68,490.79 2162.68,475.77 2180,458.45 S1.1
NetU1_2: U1.2 U2.1 | length 118
  Top Layer w10: U2.1 1054.49,1204.49 U1.2
RELAY_CTRL: R21.1 U6.12 | length 909.1
  Top Layer w10: U6.12 1739.57,1159.57 1780,1200 1820,1200 1890,1270 1890,1750 1820,1820 R21.1
RS_485_A: P4.1 R11.1 | length 236.6
  Top Layer w10: R11.1 2202.6,1540 2270,1540 2331.57,1601.57 P4.1
RS_485_B: P4.2 R12.1 | length 242.7
  Top Layer w10: R12.1 2207.4,1870 2260,1870 2331.57,1798.43 P4.2
STATUS_LED: R24.2 U6.11 | length 120.5
  Top Layer w10: U6.11 1765.16,1145.16 1780,1160 R24.2
STATUS_OUT: Q2.1 R29.1 U6.18 | length 1695.9
  Top Layer w10: v1(1560,990) 1560,1017.57 1586.02,1043.59 U6.18 ; Q2.1 2207.4,1030.12 2207.97,1030.69 v1(2207.97,1080.05)
  Bottom Layer w10: v1(1560,990) 1560,992.43 1587.57,1020 1612.43,1020 1650,982.43 1650,631.63 1681.63,600 2110,600 2160,650 2160,900 2207.97,947.97 v1(2207.97,1080.05)
STATUS_OUT_: P7.2 R26.2 | length 197.2
  Top Layer w20: R26.2 2408.43,800 P7.2
SWCLK: P8.1 U6.20 | length 89.9
  Top Layer w10: P8.1 1462.2,1092.2 U6.20
SWDIO: P8.3 R23.2 U6.19 | length 1204.2
  Top Layer w10: P8.3 1510,940 1510,990 1560.43,1040.43 U6.19 ; v1(2040,500) R23.2
  Bottom Layer w10: P8.3 1450,620 1570,500 v1(2040,500)
TRAFO_TEMP: C16.1 R28.1 U6.10 | length 755.7
  Top Layer w10: R28.1 1763.46,1346.93 C16.1 1766.54,1350 v1(1810,1350) ; U6.10 1766.9,869.54 1766.9,870 1827.29,870 v1(1853.65,843.65)
  Bottom Layer w10: v1(1810,1350) 1850,1310 1850,847.29 v1(1853.65,843.65)
TRIAC_CTRL: R19.1 U6.13 | length 493.3
  Top Layer w10: R19.1 1500,1280 1550,1230 1670,1230 1713.98,1186.02 U6.13
TRIAC_TEMP: C18.1 R31.1 U6.6 | length 1244
  Top Layer w10: U6.6 1662.8,827.2 1680,810 1870,810 v1(1900,840) ; R31.1 1763.46,1626.93 C18.1 1763.46,1620 v1(1809.81,1620)
  Bottom Layer w10: v1(1809.81,1620) 1810,1620 1900,1530 v1(1900,840)
USART1_DE: R7.1 U3.2 U3.3 U6.7 | length 1909.4
  Top Layer w10: v1(1687.19,930.29) 1687.79,929.69 1687.79,868.39 U6.7 ; v1(1840,2190) 1890,2240 2020,2240 2035,2225 U3.2 ; U3.3 U3.2 ; R7.1 2056.54,2103.46 2035,2125 U3.2
  Bottom Layer w10: v1(1687.19,930.29) 1688.25,931.35 1688.25,2068.25 1810,2190 v1(1840,2190)
USART1_RX: R13.2 R15.2 U6.9 | length 1892.5
  Top Layer w10: U6.9 1739.57,892.06 1749.77,902.26 1749.77,902.71 1761.11,914.06 1777.42,914.06 v1(1781.24,917.89) ; R15.2 2220,2166.54 R13.2 2220,2173.46 v1(2220,2220)
  Bottom Layer w10: v1(1781.24,917.89) 1781.24,918.76 1766.17,933.83 1766.17,943.83 1730,980 1730,2020 1820,2110 2110,2110 v1(2220,2220)
USART1_TX: U3.4 U6.8 | length 1476.7
  Top Layer w10: U6.8 1713.98,913.98 1720.59,920.59 v1(1725.68,920.59) ; v1(1840,2150) 1850,2150 1874.49,2174.49 U3.4
  Bottom Layer w10: v1(1725.68,920.59) 1729.5,924.42 1729.5,934.05 1730,934.55 1730,947.81 1710,967.81 1710,2050 1810,2150 v1(1840,2150)
ZEROCROSS: U1.3 U6.14 | length 400.3
  Top Layer w10: U1.3 1490,1260 1540,1210 1660,1210 1688.39,1181.61 U6.14
pads on no net: K1.12 K1.22 U2.7 U5.3 U5.5

## Polygon pours and split planes (outlines as drawn)
GND on Bottom Layer "GND_L02_P000" (solid, remove dead copper, pour order 0): 2680,2360 2680,0 560,0 560,790 1260,790 1290,820 1290,2360
GND on Top Layer "GND_L01_P001" (solid, remove dead copper, pour order 1): 2680,2360 1300,2360 1290,2370 1290,810 1270,790 560,790 560,0 2680,0

## Keep-outs
Keep-Out Layer:
  the board outline again, w10

## Other copper
Top Layer:
  rectangle net +5V: 2110,1150 2230,1240
  rectangle net NetF2_2: 960,660 1040,780
  rectangle net +3V3: 1590,210 1870,480

## Silkscreen, mask and mechanical layers (free items; w line width, h text height)
Top Overlay:
  lines w10: 10,1010 330,1010 ; 50,970 90,1010 ; 50,1010 10,970 320,970 490,800 ; 90,970 130,1010 ; 130,970 170,1010 ; 170,970 210,1010 ; 210,970 250,1010 ; 250,970 290,1010 ; 290,970 330,1010 ; 325,965 350,990 ; 350,940 372.5,962.5 ; 378.75,918.75 400,940 ; 409.38,889.38 430,910 ; 439.38,859.38 460,880 ; 460,830 480.62,850.63 ; 530,800 570,840 ; 540,840 530,840 490,800 ; 570,800 610,840 ; 610,800 650,840 ; 650,800 690,840 ; 690,800 730,840 ; 730,800 770,840 ; 770,800 810,840 ; 810,800 850,840 ; 850,800 890,840 ; 890,800 930,840 ; 930,800 970,840 ; 970,800 1010,840 ; 1010,800 1050,840 ; 1050,800 1090,840 ; 1090,800 1130,840 ; 1130,800 1170,840 ; 1199.38,840.63 1220.62,819.38 ; 1229.38,860.63 1245,845 ; 1240,920 1280,960 ; 1240,960 1280,1000 ; 1240,1000 1280,1040 ; 1240,1040 1280,1080 ; 1240,1120 1280,1160 ; 1240,1160 1280,1200 ; 1240,1240 1280,1280 ; 1240,1280 1280,1320 ; 1240,1317.21 1280,1357.21 ; 1240,1360 1280,1400 ; 1240,1410 1280,1450 ; 1240,1460 1280,1500 ; 1240,1510 1280,1550 ; 1240,1560 1280,1600 ; 1240,1610 1280,1650 ; 1240,1660 1280,1700 ; 1240,1710 1280,1750 ; 1240,1760 1280,1800 ; 1240,1810 1280,1850 ; 1240,1860 1280,1900 ; 1240,1910 1280,1950 ; 1240,1960 1280,2000 ; 1240,2010 1280,2050 ; 1240,2060 1280,2100 ; 1240,2110 1280,2150 ; 1240,2160 1280,2200 ; 1240,2210 1280,2250 ; 1240,2260 1280,2300 ; 1240,2310 1280,2350 1280,870 1210,800 490,800 ; 1240,2350 1240,880 ; 1240.29,1080.4 1280.29,1120.4 ; 1243.29,1206.32 1278.88,1241.91 ; 1280,920 1240,880 ; 330,1010 500,840 1200,840 1240,880
  text "www.imedia.ba" at 1811.02,2283.46 h60
  text "L IN" at 250,1880 h45
  text "L OUT" at 250,1630 h45
  text "A RS485 B" at 2630,1520 h45 r90
  text "N" at 250,1360 h60
  text "STATUS" at 2040,1250 h60 r90
  text "N" at 250,1120 h60
  text "+24V GND +5V" at 2630,920 h45 r90
  text "RUN STAT" at 2630,520 h45 r90
  text "POWER TRAFO SEC." at 299.99,340 h40 r90
  text "DE-260924" at 250,30 h60
  text "A0 A1 A2" at 1930,30 h40
Bottom Overlay:
  drawing of 88 lines, arcs and shapes, not listed
  text "v" at 820,2130 h40
  text "member of iMedia Group" at 2285,2130 h45 r90
  text "JUBERA d.o.o. Sarajevo" at 1955,2100 h45 r90
  text "Bosna i Hercegovina" at 2031.54,2093.46 h45 r90
  text "PRODUCED:" at 1870,2090 h45 r90
  text "!!! PAZNJA !!!" at 1070,2040 h60
  text "www.imedia.ba" at 2200,1940 h45 r90
  text "v" at 930,1840 h40
  text "MREZNI NAPON" at 1120,1760 h60
  text "220 V" at 960,1280 h70
  text "24VDC/1A PPTC FUSED" at 2620,1090 h40 r90
  text "!!! WARNING !!!" at 1160,1080 h60
  text "5VDC/1A PPTC FUSED" at 2550,1050 h40 r90
  text "HIGH VOLTAGE" at 1180,920 h60
  text "DIP SWITCH:" at 1890,520 h45
  text "ALL OFF = ADDRESS 0 / DELAY 0s" at 1907.13,435.9 h28
  text "A0 ON   = ADDRESS 1 / DELAY 2s" at 1907.13,380.49 h28
  text "20VAC MAX." at 290,330 h60 r270
  text "A1 ON   = ADDRESS 2 / DELAY 4s" at 1907.13,325.08 h28
  text "A0+A1ON = ADDRESS 3 / DELAY 6s" at 1907.13,269.66 h28
  text "A2 ON   = ADDRESS 4 / DELAY 8s" at 1907.13,214.25 h28
  text "A0+A2ON = ADDRESS 5 / DELAY 10s" at 1907.13,158.83 h28
  text "A1+A2ON = ADDRESS 6 / DELAY 12s" at 1907.13,103.41 h28
  text "ALL ON  = ADDRESS 7 / DELAY 14s" at 1907.13,48 h28

## Dimensions
0,2362.2 to 0,0 on Mechanical 1
0,2362.2 to 2677.17,2362.2 on Mechanical 1

## Text inside footprints (layer, text, board x,y; h text height)
C10: Top Overlay "+" at 1150,38.43 h30 r90